# EAGLE board untitled (EAGLE 9.3.1)
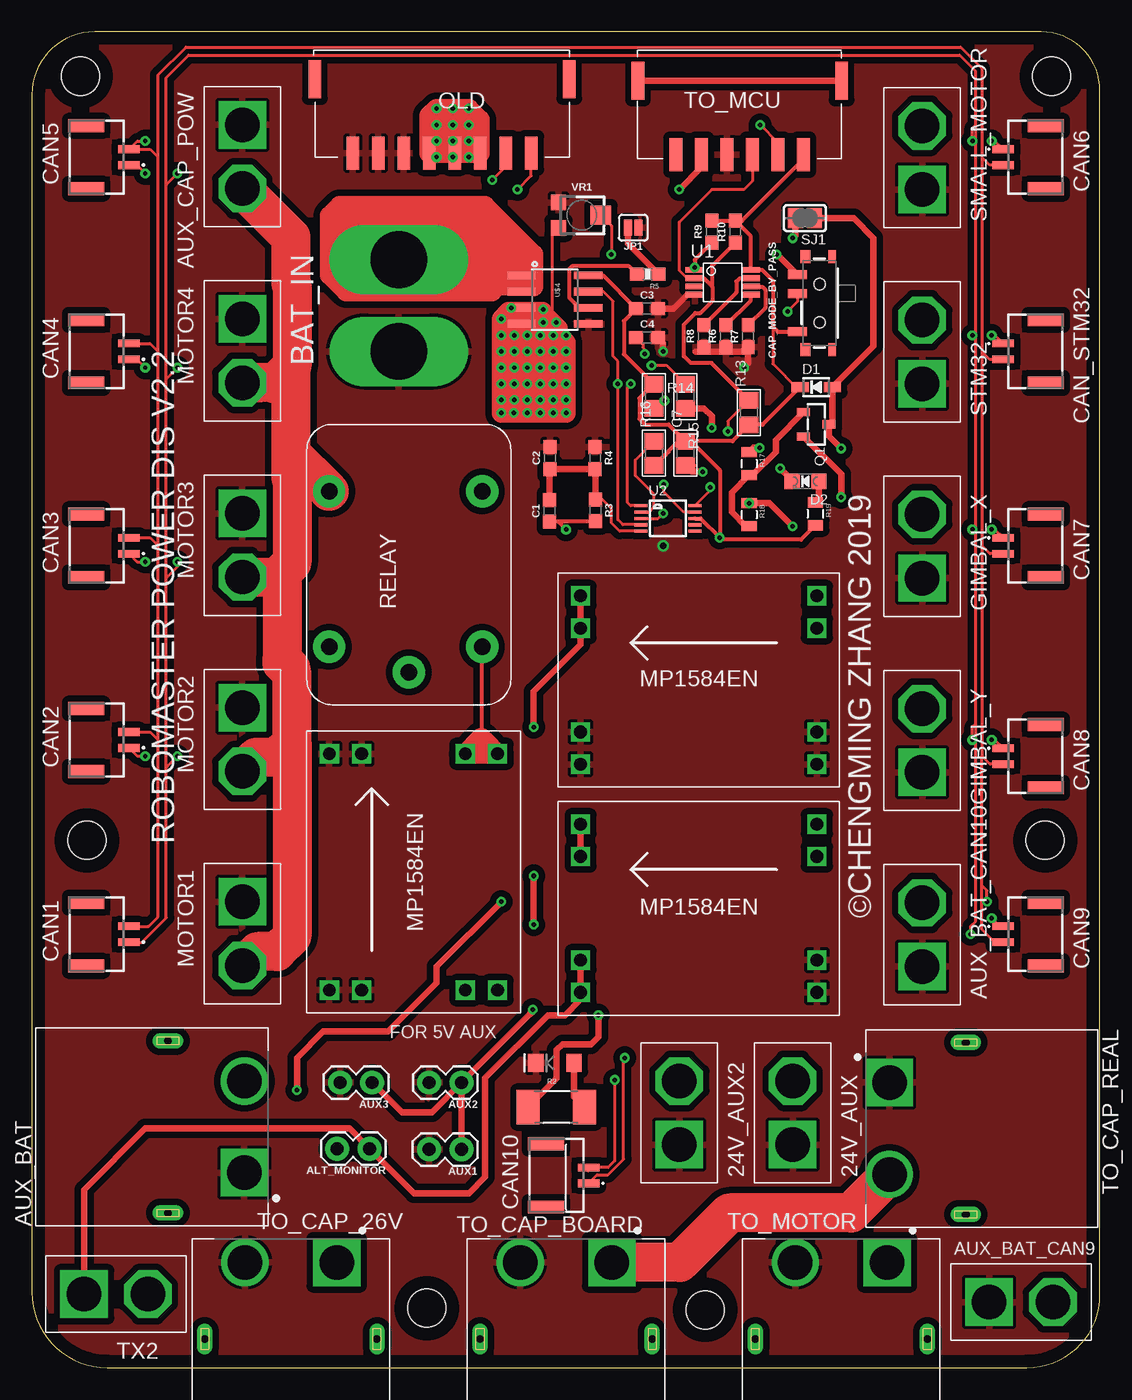
[diagram p0: board, top side]
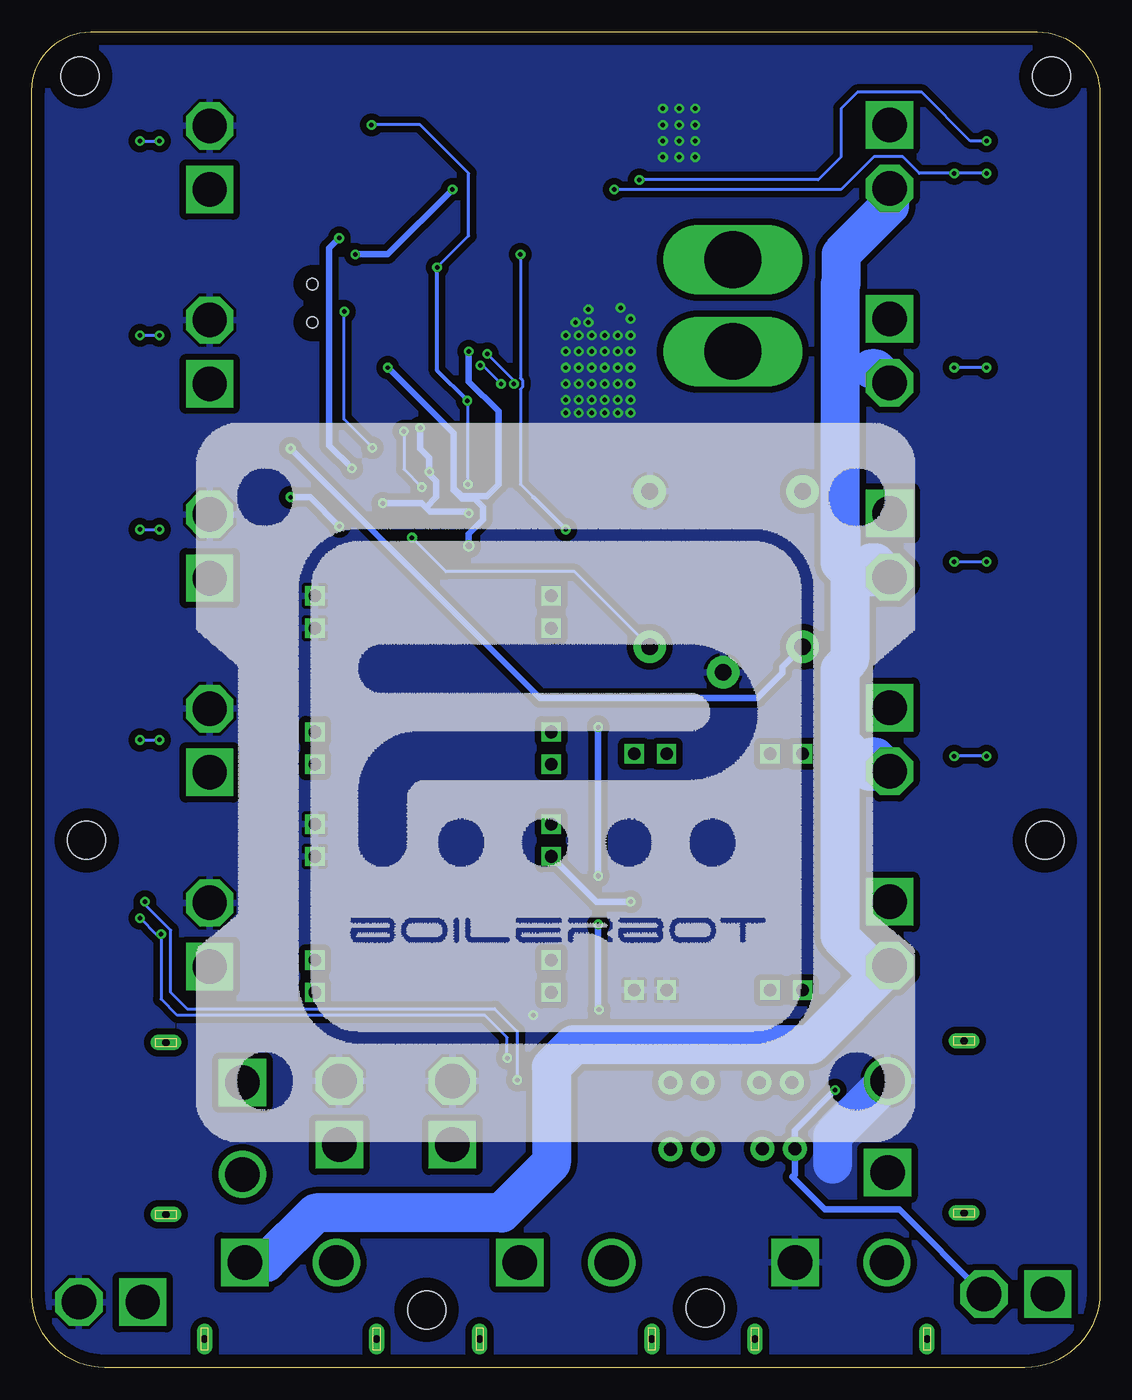
[diagram p1: board, bottom side, seen from below]

Size 83.8 x 104.79 mm. Coordinates in mm from the lower left corner, seen from the top.
Outline: 79.2,104.79 4.92,104.79 arc90 0,99.87 0,5.91 arc90 5.91,0 78.08,0 arc90 83.8,5.72 83.8,100.19 arc90 79.2,104.79
Copper layers (1*16): Top 0.035mm / dielectric 1.5mm / Bottom 0.035mm
Design rules "default *": minimum track width 6mil, minimum drill 0.35mm, track to track 6mil, track to pad 6mil, pad to pad 6mil, via to via 6mil, smd to smd 6mil, copper to edge 40mil, drill to drill 6mil, minimum pad ring 10mil, minimum via ring 8mil, stop-mask expansion 4mil, vias tented up to drill 20mil, thermal gap 10mil
Net classes: 0 default: width 0.508 mm, drill 0.254 mm, clearance 0.508 mm; 1 sig: width 0.254 mm, drill 0.305 mm, clearance 0.127 mm
Holes 3 mm at 3.81,101.31 80.01,101.31 4.32,41.37 79.5,41.37 52.83,4.54 30.99,4.66

## Footprints (pad centres in the part's own frame; a part is rotated, then mirrored left to right if it is on the bottom)
XT30 = drill 2.7 square: P$1 0,0 | drill 2.7 octagon: P$2 5,0
1X02 = drill 1.016 pad 1.88: 1 0,0; 2 2.54,0
AMASS_XT60PW-M = drill 2.7 square: 1 -3.6,-6 | drill 2.7: 2 3.6,-6 | drill 0.6 pad 1.2 long: S1 -6.75,0; S2 6.75,0
XT60 = drill 4.45 long: 1 -7.2,7.2; 2 0,7.2
LED-1206 = smd 1.2 x 1.4: A -1.5,0; C 1.5,0
0603 = smd 1.1 x 1: 1 -0.85,0; 2 0.85,0
0805 = smd 1.3 x 1.5: 1 -0.95,0; 2 0.95,0
BM02B-GHS-TBT_1 = smd 0.6 x 1.7: 1 0.625,0; 2 -0.625,0 | smd 1 x 2.8: 3 -2.475,-3.35; 4 2.475,-3.35
SWITCH_SPST_SMD_A = smd 0.7 x 1.5: 1 -2.25,-1.75; 2 -0.75,-1.75; 3 2.25,-1.75 | smd 1 x 0.6: GND1 -3.65,1; GND3 3.65,1 | smd 1 x 0.8: GND2 -3.65,-1.1; GND4 3.65,-1.1 | hole 0.9: -1.5,0; 1.5,0
SOD-323 = smd 1.35 x 0.8: A 1.27,0; C -1.27,0
CHIPLED_0805_NOOUTLINE = smd 1.2 x 1.2: A 0,-1.05; C 0,1.05
SMT-JUMPER_2_NO_SILK = smd 0.635 x 1.27: 1 -0.406,0; 2 0.406,0
S8B-PH-SM4_TB = smd 1 x 2.6: 1 4,7.3; 2 6,7.3; 3 8,7.3; 4 10,7.3; 5 12,7.3; 6 14,7.3; 7 16,7.3; 8 18,7.3 | smd 1 x 3: 9 1.016,1.5; 10 20.984,1.5
SOT23-R = smd 0.635 x 1.016: 1 -0.95,-1; 2 0.95,-1; 3 0,1
R2010 = smd 1.8 x 2.7: 1 -2.2,0; 2 2.2,0
0603-RES = smd 1.1 x 1: 1 -0.85,0; 2 0.85,0
0805' = smd 0.8 x 1.2: 1 -0.9,0; 2 0.9,0
RELAY_G5LE-1 = drill 1.3 pad 2.54: 1 -8.35,0; 2 -6.35,-5.75; 3 5.85,-5.75; 4 5.85,6.25; 5 -6.35,6.25
SOLDERJUMPER_CLOSEDWIRE = smd 1.168 x 1.6: 1 -0.762,0; 2 0.762,0 | smd 0.635 x 0.203: WIRE 0,0
S6B-PH-SM4_TB = smd 1 x 2.6: 1 5.46,9.68; 2 7.46,9.68; 3 9.46,9.68; 4 11.46,9.68; 5 13.46,9.68; 6 15.46,9.68 | smd 1 x 3: GND 2.476,3.88; GND2 18.444,3.88
MSOP-8 = smd 1.45 x 0.45: 1 -2.2,0.975; 2 -2.2,0.325; 3 -2.2,-0.325; 4 -2.2,-0.975; 5 2.2,-0.975; 6 2.2,-0.325; 7 2.2,0.325; 8 2.2,0.975
MSOP10 = smd 0.25 x 1: 1 -1,-2.113; 2 -0.5,-2.113; 3 0,-2.113; 4 0.5,-2.113; 5 1,-2.113; 6 1,2.113; 7 0.5,2.113; 8 0,2.113; 9 -0.5,2.113; 10 -1,2.113
MP1584_AMAZON = drill 1 square: 1 1.778,14.986; 2 1.778,12.446; 3 1.778,4.318; 4 1.778,1.778; 5 20.32,14.986; 6 20.32,12.446; 7 20.32,4.318; 8 20.32,1.778
SO08 = smd 0.61 x 2.21: 1 -1.905,-2.616; 2 -0.635,-2.616; 3 0.635,-2.616; 4 1.905,-2.616; 5 1.905,2.616; 6 0.635,2.616; 7 -0.635,2.616; 8 -1.905,2.616
TRIMPOT-SMD-TC33X = smd 1.2 x 1.2: 1 -1,-1.825; 3 1,-1.825 | smd 1.5 x 1.6: 2 0,1.5

## Placement (x,y rotation side)
24V_AUX  XT30  [XT30]  59.69,17.49 90 top
24V_AUX2  XT30  [XT30]  50.8,17.49 90 top
ALT_MONITOR  [1X02]  26.49,17.18 180 top
AUX1  [1X02]  33.7,17.11 180 top
AUX2  [1X02]  33.71,22.36 180 top
AUX3  [1X02]  26.71,22.36 180 top
AUX_BAT  XT60PW-M  [AMASS_XT60PW-M]  10.67,18.89 90 top
AUX_BAT_CAN9  XT30  [XT30]  75.11,5.14 0 top
AUX_BAT_CAN10  XT30  [XT30]  69.85,31.46 90 top
AUX_CAP_POW  XT30  [XT30]  16.51,97.5 270 top
BAT_IN  XT60  [XT60]  21.59,79.72 270 top
BAT_STATUS  3V 20mA  [LED-1206]  41.04,23.91 180 top
C1  0.1uF  [0603]  40.61,67.21 90 top
C2  0.1uF  [0603]  40.65,71.36 90 top
C3  0.1uF  [0603]  48.26,83.07 0 top
C4  1nF  [0603]  48.26,80.8 0 top
C7  1µF  [0805]  51.27,71.73 90 top
CAN1  BM02B-GHS-TBT(LF)(SN)  [BM02B-GHS-TBT_1]  7.62,34 270 top
CAN2  BM02B-GHS-TBT(LF)(SN)  [BM02B-GHS-TBT_1]  7.62,49.24 270 top
CAN3  BM02B-GHS-TBT(LF)(SN)  [BM02B-GHS-TBT_1]  7.62,64.48 270 top
CAN4  BM02B-GHS-TBT(LF)(SN)  [BM02B-GHS-TBT_1]  7.62,79.72 270 top
CAN5  BM02B-GHS-TBT(LF)(SN)  [BM02B-GHS-TBT_1]  7.62,94.96 270 top
CAN6  BM02B-GHS-TBT(LF)(SN)  [BM02B-GHS-TBT_1]  76.2,94.96 90 top
CAN7  BM02B-GHS-TBT(LF)(SN)  [BM02B-GHS-TBT_1]  76.2,64.48 90 top
CAN8  BM02B-GHS-TBT(LF)(SN)  [BM02B-GHS-TBT_1]  76.2,47.97 90 top
CAN9  BM02B-GHS-TBT(LF)(SN)  [BM02B-GHS-TBT_1]  76.2,34 90 top
CAN10  BM02B-GHS-TBT(LF)(SN)  [BM02B-GHS-TBT_1]  43.69,15.08 270 top
CAN_STM32  BM02B-GHS-TBT(LF)(SN)  [BM02B-GHS-TBT_1]  76.2,79.72 90 top
CAP_MODE_BY_PASS  [SWITCH_SPST_SMD_A]  61.8,83.51 270 top
D1  1N4148  [SOD-323]  61.54,76.92 0 top
D2  CAP_INDICATOR  [CHIPLED_0805_NOOUTLINE]  60.69,69.53 90 top
GIMBAL_X  XT30  [XT30]  69.85,61.94 90 top
GIMBAL_Y  XT30  [XT30]  69.85,46.7 90 top
JP1  JUMPER-SMT_2_NO_SILK  [SMT-JUMPER_2_NO_SILK]  47.18,89.42 180 top
MOTOR1  XT30  [XT30]  16.51,36.54 270 top
MOTOR2  XT30  [XT30]  16.51,51.78 270 top
MOTOR3  XT30  [XT30]  16.51,67.02 270 top
MOTOR4  XT30  [XT30]  16.51,82.26 270 top
OLD  S8B-PH-SM4_TB  [S8B-PH-SM4_TB]  43.18,102.58 180 top
Q1  MMBT2222  [SOT23-R]  61.54,74 270 top
R2  1.2K  [R2010]  41.14,20.44 180 top
R3  10k  [0603]  44.21,67.26 270 top
R4  2.0k  [0603]  44.19,71.36 270 top
R5  4.7K  [0603-RES]  48.32,85.79 180 top
R6  10k  [0603]  54.46,80.92 90 top
R7  10k  [0603]  56.19,80.92 90 top
R8  10k  [0603]  52.73,80.92 90 top
R9  10k  [0603]  53.35,89.11 90 top
R10  10k  [0603]  55.19,89.11 90 top
R13  10K  [0805]  56.27,74.92 90 top
R14  10K  [0805]  48.81,76.19 270 top
R15  10K  [0805]  51.27,76.19 270 top
R16  10K  [0805]  48.81,71.73 90 top
R17  1K  [0805']  56.27,70.92 270 top
R18  10K  [0805']  56.27,66.92 270 top
R19  1K  [0805']  61.48,66.98 270 top
RELAY  RELAY_G5LE  [RELAY_G5LE-1]  29.57,62.9 90 top
SJ1  [SOLDERJUMPER_CLOSEDWIRE]  60.65,90.18 180 top
SMALL_MOTOR  XT30  [XT30]  69.85,92.42 90 top
STM32  XT30  [XT30]  69.85,77.18 90 top
TO_CAP_26V  XT60PW-M  [AMASS_XT60PW-M]  20.32,2.25 180 top
TO_CAP_BOARD  XT60PW-M  [AMASS_XT60PW-M]  41.91,2.25 180 top
TO_CAP_REAL  XT60PW-M  [AMASS_XT60PW-M]  73.28,18.76 270 top
TO_MCU  S6B-PH-SM4_TB  [S6B-PH-SM4_TB]  66,104.84 180 top
TO_MOTOR  XT60PW-M  [AMASS_XT60PW-M]  63.5,2.25 180 top
TX2  XT30  [XT30]  4.09,5.76 0 top
U1  MCP9808MSOP  [MSOP-8]  54.21,85.14 0 top
U2  ADS1115IDGST  [MSOP10]  49.91,66.62 270 top
U$1  MP1584  [MP1584_AMAZON]  38.32,27.84 90 top
U$2  MP1584  [MP1584_AMAZON]  63.37,44.41 180 top
U$4  ACS723  [SO08]  41.04,83.78 270 top
U$5  MP1584  [MP1584_AMAZON]  63.37,62.32 180 top
VR1  10k  [TRIMPOT-SMD-TC33X]  43.14,90.41 270 top

## Library data of the parts
24V_AUX 24V_AUX2 AUX_BAT_CAN9 AUX_BAT_CAN10 AUX_CAP_POW BAT_IN GIMBAL_X GIMBAL_Y MOTOR1-MOTOR4 SMALL_MOTOR STM32 TO_MCU TX2 U$1 U$2 U$5 = NewKevinMade
ALT_MONITOR AUX1-AUX3 = SparkFun-Connectors
AUX_BAT TO_CAP_26V TO_CAP_BOARD TO_CAP_REAL TO_MOTOR = XT60PW-M; AVAILABILITY: Unavailable; MF: AMASS; MP: XT60PW-M; PACKAGE: Package Analog Devices; PRICE: None
BAT_STATUS = SparkFun-LED
C1-C3 = SparkFun-Capacitors; PROD_ID: CAP-00810
C4 = SparkFun-Capacitors; PROD_ID: CAP-07886
C7 D1 D2 Q1 R13-R16 RELAY SJ1 U2 = microbuilder
CAN1-CAN10 CAN_STM32 = SamacSys_Parts; DESCRIPTION: GH 1.25mm header top entry 2 way JST GH Series, 1.25mm Pitch 2 Way Shrouded Straight PCB Header, Surface Mount, Solder Termination; HEIGHT: mm; MANUFACTURER_NAME: JST (JAPAN SOLDERLESS TERMINALS); MANUFACTURER_PART_NUMBER: BM02B-GHS-TBT(LF)(SN); RS_PART_NUMBER: 7521762P
CAP_MODE_BY_PASS = SparkFun-Switches; PROD_ID: SWCH-10651; SF_SKU: COM-10860
JP1 = SparkFun-Jumpers
OLD = KevinMade
R2 = SparkFun-Passives
R3 R6-R10 = SparkFun-Resistors; PROD_ID: RES-00824
R4 = SparkFun-Resistors; PROD_ID: RES-08296
R5 = SparkFun-Resistors; PROD_ID: RES-07857
R17-R19 = SparkFun-Resistors
U1 = MCP9808; AVAILABILITY: Unavailable; DESCRIPTION: MCP9808 Series SMD 3.6 V Memory Module Digital Temperature Sensor - MSOP-8; MF: Microchip; MP: MCP9808-E/MS; PACKAGE: MSOP-8 Microchip; PRICE: None
U$4 = SparkFun-Sensors; PART_#: ACS723ACS723LLCTR-05AB-T2; PROD_ID: IC-13872
VR1 = SparkFun-Resistors; PROD_ID: RES-12428, RES-08048

## Nets
5V_AUX: AUX1.1 AUX2.1 AUX3.1 U$5.7 U$5.8
ADDR [sig]: R15.1 U2.1
ALERT [sig]: R16.2 U2.2
ALT_GND [sig]: ALT_MONITOR.1 TX2.P$1 U$2.5 U$2.6
ALT_VCC [sig]: ALT_MONITOR.2 TX2.P$2 U$2.7 U$2.8
ANALOG_OUT [sig]: C1.2 C2.1 R3.1 R4.2 U2.5
AUX_DIGI: TO_MCU.6
BAT_24V: 24V_AUX2.P$2 24V_AUX.P$2 AUX_BAT.2 AUX_BAT_CAN9.P$2 AUX_BAT_CAN10.P$2 GIMBAL_X.P$2 GIMBAL_Y.P$2 OLD.3 OLD.4 OLD.5 R2.2 RELAY.1 RELAY.3 SMALL_MOTOR.P$2 STM32.P$2 TO_CAP_26V.1 U$1.3 U$1.4 U$2.3 U$2.4 U$4.3 U$4.4 U$5.3 U$5.4 VR1.3
BAT_GND: 24V_AUX2.P$1 24V_AUX.P$1 AUX1.2 AUX2.2 AUX3.2 AUX_BAT.1 AUX_BAT_CAN9.P$1 AUX_BAT_CAN10.P$1 AUX_CAP_POW.P$1 BAT_IN.2 BAT_STATUS.C C2.2 C3.2 C4.2 GIMBAL_X.P$1 GIMBAL_Y.P$1 JP1.1 MOTOR1.P$1 MOTOR2.P$1 MOTOR3.P$1 MOTOR4.P$1 OLD.6 OLD.7 OLD.8 R4.1 R6.1 R7.1 R8.1 SMALL_MOTOR.P$1 STM32.P$1 TO_CAP_26V.2 TO_CAP_BOARD.2 TO_CAP_REAL.1 TO_MCU.4 TO_MOTOR.2 U1.4 U$1.1 U$1.2 U$1.5 U$1.6 U$2.1 U$2.2 U$4.5 U$5.1 U$5.2 U$5.5 U$5.6 VR1.1
BAT_IN: BAT_IN.1 U$4.1 U$4.2
BW_SEL [sig]: R5.2 U$4.6
CAN_H [sig]: CAN1.2 CAN2.2 CAN3.2 CAN4.2 CAN5.2 CAN6.2 CAN7.2 CAN8.2 CAN9.2 CAN10.2 CAN_STM32.2 OLD.2
CAN_L [sig]: CAN1.1 CAN2.1 CAN3.1 CAN4.1 CAN5.1 CAN6.1 CAN7.1 CAN8.1 CAN9.1 CAN10.1 CAN_STM32.1 OLD.1
CAP_24V: TO_CAP_BOARD.1 TO_CAP_REAL.2
CAP_MOTOR_24V: AUX_CAP_POW.P$2 MOTOR1.P$2 MOTOR2.P$2 MOTOR3.P$2 MOTOR4.P$2 RELAY.4 TO_MOTOR.1
CAP_OR_BAT: CAP_MODE_BY_PASS.1 TO_MCU.5
GND: C7.1 Q1.2 R15.2 R18.1 U2.3
MCU_VCC [sig]: C3.1 C7.2 CAP_MODE_BY_PASS.3 D1.C R9.2 R10.2 R13.1 R14.1 R16.1 R19.2 RELAY.2 TO_MCU.1 U1.8 U2.8 U$1.7 U$1.8 U$4.8
N$1 [sig]: CAP_MODE_BY_PASS.2 R17.1
N$4 [sig]: JP1.2 R5.1
N$5 [sig]: BAT_STATUS.A R2.1
N$7: TO_MCU.GND TO_MCU.GND2
N$8 [sig]: C1.1 R3.2 VR1.2
N$12: D1.A Q1.3 RELAY.5 SJ1.1
N$13 [sig]: R8.2 U1.7
N$14 [sig]: R7.2 U1.6
N$15 [sig]: R6.2 U1.5
N$22: Q1.1 R17.2 R18.2
N$25: D2.C SJ1.2
N$26: D2.A R19.1
SCL [sig]: R10.1 R13.2 TO_MCU.3 U1.2 U2.10
SDA [sig]: R9.1 R14.2 TO_MCU.2 U1.1 U2.9
VIOUT [sig]: C4.1 U2.4 U$4.7

## Tracks (layer width: path | path; a pad name or v marks a point on that pad's centre or on a via)
5V_AUX  (via drill 0.36)
  Top 0.508: 33.7,22.34 AUX2.1 | U$5.8 U$5.7 43.05,56.73 39.37,53.05 v39.37,50.26 | 39.37,28.02 39.31,27.96 | AUX2.1 39.06,27.71 39.31,27.96 | AUX2.1 33.71,17.12 AUX1.1 | AUX3.1 29.04,20.03 31.38,20.03 AUX2.1 | v39.37,38.57 39.37,37.05 v39.37,34.76 | v39.31,28.08 39.31,27.96
  Bottom 0.508: v39.37,50.26 v39.37,38.57 | v39.37,34.76 39.37,28.15 v39.31,28.08
ADDR  (via drill 0.35)
  Top 0.254: 47.28,67.62 U2.1 46.98,67.62 46.74,67.86 46.74,76.93 v46.99,77.18 | v48.62,78.63 49.78,78.63 R15.1
  Bottom 0.254: v48.62,78.63 48.44,78.63 v46.99,77.18
ALERT
  Top 0.254: U2.2 48.44,67.12 48.82,67.5 48.82,68.39 48.79,68.42 48.79,68.52 47.35,69.97 47.35,71.22 R16.2
ALT_GND
  Top 0.508: U$2.6 U$2.5 43.05,28.89 41.81,27.65 40.49,27.65 35.56,22.72 35.56,14.95 34.29,13.68 29.99,13.68 ALT_MONITOR.1 24.91,18.76 8.89,18.76 4.09,13.96 TX2.P$1
ALT_VCC  (via drill 0.35)
  Top 0.508: U$2.8 U$2.7 | v20.79,21.77 20.79,24.31 22.86,26.38 27.94,26.38 31.75,30.19 31.75,31.46 v36.83,36.54
  Bottom 0.508: TX2.P$2 15.74,12.41 21.59,12.41 24.13,14.95 23.95,15.13 ALT_MONITOR.2 23.95,18.61 v20.79,21.77 | v36.83,36.54 39.5,36.54 U$2.7
ANALOG_OUT
  Top 0.254: U2.5 46.1,65.62 45.47,66.26 45.47,67.4 44.76,68.11 R3.1
  Top 0.508: R3.1 44.21,70.49 R4.2 C2.1 40.61,70.47 C1.2
BAT_24V  (via drill 0.35)
  Top 0.254: VR1.3 40.81,88.9 40.81,81.52 41.34,80.99
  Top 0.508: v44.45,27.65 44.45,25.95 43.88,25.37 41.62,25.37 41.18,24.93 41.18,22.68 R2.2 | 38.42,82.84 U$4.3
  Top 1.016: v41.91,78.45 41.91,80.77 41.53,81.15 41.53,81.62 v40.13,83.02
  Top 1.524: v36.83,80.99 37.47,80.36 38.86,81.75 39.51,81.75 | 38.42,82.84 37.41,82.84 v36.83,82.26 v36.83,80.99 | v36.83,75.91 38.1,75.91 38.42,76.23 38.42,77.5 | v36.83,75.91 v36.83,80.99 | 38.42,77.5 38.42,79.47 40.64,79.47 | 38.42,77.5 38.1,77.18 38.1,77.98 | 38.1,77.98 38.1,79.72 | v36.83,75.91 41.32,80.4 | 41.32,79.47 40.64,79.47 | OLD.3 OLD.4 OLD.5 31.18,98.2 v31.75,98.77 v33.02,98.77 v34.29,98.77 35.18,97.88 OLD.3 | OLD.3 35.18,96.61 v34.29,97.5 v33.02,97.5 v31.75,97.5 v31.75,96.23 v33.02,96.23 v34.29,96.23 | U$4.4 39.31,80.99 40.13,80.99 40.89,80.23 v40.89,79.72 | v40.89,79.72 40.64,79.47 | v38.86,79.72 v38.86,80.99 | v39.88,79.72 39.46,79.31 39.43,79.31 38.1,77.98 | v39.88,80.99 41.34,80.99 41.62,80.7 | 41.62,80.7 41.91,80.42 v41.91,74.89 v36.83,74.89 v36.83,75.91 | v36.83,75.91 v40.89,75.91 | v40.89,77.18 v38.86,77.18 40.13,78.45 v40.89,78.45 | 40.06,82.84 38.42,82.84 | 38.42,82.84 39.51,81.75 | 39.51,81.75 40.13,81.75 | v40.89,79.72 40.89,79.97 41.62,80.7
  Bottom 3.048: AUX_BAT.2 20.98,18.18 20.98,15.95
  other vias: 36.83,79.72 36.83,78.45 36.83,77.18 37.85,80.99 37.85,79.72 37.85,78.45 37.85,77.18 37.85,75.91 38.86,78.45 38.86,75.91 31.75,94.96 33.02,94.96 34.29,94.96 37.62,83.12 37.82,74.89 38.86,74.89 39.88,75.91 39.88,74.89 40.89,80.99 39.88,78.45 39.88,77.18 40.89,74.89 41.91,79.72 41.91,77.18 41.91,75.91 41.91,80.99 40.13,82.01 41.15,82.01
  pour Bottom: -1.27,106.39 -1.27,-1.56 86.36,-1.56 86.36,106.39
BAT_GND  (via drill 0.35, 0.51)
  Top 0.508: U1.4 51.44,84.17 50.34,83.07 C3.2 | 52.07,79.72 55.84,79.72 R7.1 56.19,78.77 v55.87,78.45 | C4.2 49.53,80.38 v49.53,79.72
  Bottom 0.508: 49.5,79.72 v49.53,79.72 49.53,77.37 47.18,75.02 47.18,69.28 48.11,68.36 50.07,68.36 50.72,69.01 | v55.87,78.45 50.73,73.31 50.73,69.03 50.72,69.01 | 50.72,69.01 50.72,68.83 50.05,68.17 49.06,68.17 48.39,67.49 48.39,66.55 49.53,65.41 v49.53,64.48
  pour Top: 0,105.12 0,-0.29 83.82,-0.29 83.82,103.85 82.55,105.12
BAT_IN
  Top 0.508: U$4.2 38.42,84.87
  Top 1.524: BAT_IN.1 31.3,84.42 | 31.3,84.42 36.11,84.42 36.57,84.87 38.42,84.87 U$4.1 37.19,86.92 30.48,86.92 30.48,87.34 | BAT_IN.1 29.64,86.07 36.83,86.07 35.56,84.8 30.91,84.8 BAT_IN.1 | BAT_IN.1 28.79,90.73 29.21,91.15 | 30.48,87.34 30.48,88.61 29.21,89.88 35.56,89.88 38.1,87.34 38.1,86.07 39.37,84.8 39.37,87.34 35.56,91.15 29.21,91.15 | 30.48,87.34 29.21,88.61 35.56,88.61 36.83,87.34 30.48,87.34 | BAT_IN.1 27.94,87.77 27.94,91.15 | 27.94,91.15 24.13,91.15 23.37,90.39 23.37,85.69 24.64,84.42 31.3,84.42 | 27.94,91.15 29.21,91.15 | BAT_IN.1 29.21,86.5 29.21,84.8 25.4,84.8 24.13,86.07 24.13,89.88 26.67,89.88 27.94,88.61 27.94,86.07 | 26.67,86.07 25.4,86.07 25.4,88.61 26.67,88.61 26.67,86.07 | 26.67,86.07 27.94,86.07 | 27.94,86.07 BAT_IN.1
BW_SEL
  Top 0.305: 42.94,83.14 U$4.6 42.94,83.14 | R5.2 46.86,86.4 42.38,86.4 42.14,86.16 42.14,83.94 42.94,83.14
CAN_H  (via drill 0.35)
  Top 0.254: CAN1.2 9.16,34.62 9.91,35.38 9.91,49.24 | 74.55,94.96 74.55,101.92 72.88,103.6 12.09,103.6 9.91,101.42 9.91,94.96 | 74.55,94.96 74.55,79.72 | 74.55,79.72 74.55,64.48 | 74.55,64.48 74.55,47.97 | 74.55,37.81 74.55,34.38 75.56,33.38 CAN9.2 | 74.55,37.81 74.55,47.97 | 9.91,49.24 9.91,64.48 | 9.91,64.48 9.91,79.72 | 9.91,79.72 9.91,94.96 | CAN2.2 9.28,49.86 9.91,49.24 | CAN4.2 9.28,80.34 9.91,79.72 | 9.91,94.96 9.28,95.59 CAN5.2 8.27,96.23 v8.89,96.23 | CAN6.2 75.17,94.34 74.55,94.96 | CAN_STM32.2 75.17,79.09 74.55,79.72 | CAN7.2 75.17,63.86 74.55,64.48 | CAN8.2 75.17,47.34 74.55,47.97 | CAN3.2 9.28,65.11 9.91,64.48 | 43.66,15.43 CAN10.2 45.2,15.71 45.72,16.22 v45.72,22.57 | v74.93,36.54 74.93,37.43 74.55,37.81 | v36.13,93.18 37.18,94.23 OLD.2
  Bottom 0.254: v74.93,36.54 74.93,36.34 72.9,34.31 72.9,29.43 71.63,28.16 47.5,28.16 45.72,26.38 v45.72,22.57 | v8.89,96.23 10.16,96.23 13.97,100.04 19.05,100.04 20.32,98.77 20.32,94.96 22.1,93.18 v36.13,93.18
CAN_L  (via drill 0.35)
  Top 0.254: CAN1.1 8.62,33.38 10.54,35.29 10.54,47.08 | 10.54,47.08 10.54,61.94 | 10.54,61.94 10.54,77.56 | 10.54,77.56 10.54,92.8 | 10.54,92.8 10.54,101.2 12.3,102.96 72.79,102.96 74.04,101.71 74.04,97.5 | 74.04,50.51 74.04,35.02 73.66,34.63 v73.66,34 | 74.04,50.51 74.04,66 | 74.04,66 74.04,81.24 | 74.04,81.24 74.04,97.5 | CAN2.1 8.27,47.97 v8.89,47.97 | v11.43,47.97 10.54,47.08 | CAN3.1 8.27,63.21 v8.89,63.21 | v11.43,63.21 11.43,62.83 10.54,61.94 | CAN4.1 8.24,79.09 v8.89,78.45 | v11.43,78.45 10.54,77.56 | CAN5.1 8.24,94.34 v8.89,93.69 | v11.43,93.69 10.54,92.8 | CAN6.1 75.56,96.23 v75.31,96.23 | v73.79,96.23 73.79,97.25 74.04,97.5 | CAN_STM32.1 75.56,80.99 v75.31,80.99 | v73.79,80.99 74.04,81.24 | CAN7.1 75.56,65.75 v75.31,65.75 | v73.79,65.75 74.04,66 | CAN8.1 75.56,49.24 v75.31,49.24 | v73.79,49.24 73.79,50.26 74.04,50.51 | CAN9.1 75.95,34.62 v75.31,35.27 | v38.1,92.42 39.18,93.5 OLD.1 | CAN10.1 44.36,15.13 45.2,15.13 46.43,16.36 46.43,24.22 v46.51,24.3
  Bottom 0.254: v8.89,47.97 v11.43,47.97 | v8.89,63.21 v11.43,63.21 | v8.89,78.45 v11.43,78.45 | v11.43,93.69 v8.89,93.69 14.17,93.69 15.48,94.99 17.75,94.99 20.32,92.42 v38.1,92.42 | v75.31,96.23 v73.79,96.23 | v75.31,80.99 v73.79,80.99 | v75.31,65.75 v73.79,65.75 | v75.31,49.24 v73.79,49.24 73.66,49.24 | v75.31,35.27 74.04,34 v73.66,34 73.66,28.92 72.39,27.65 48.26,27.65 46.51,25.9 v46.51,24.3
CAP_24V
  Top 3.048: TO_CAP_BOARD.1 50.83,8.25 54.72,12.14 64.26,12.14 TO_CAP_REAL.2
CAP_MOTOR_24V
  Top 3.048: AUX_CAP_POW.P$2 20.32,88.69 20.32,85.04 20.4,84.96 20.4,78.53 20.32,78.45 | 19.63,62.39 19.63,55.57 | 19.63,55.57 20.32,54.88 | MOTOR3.P$2 19.27,62.02 19.63,62.39 | 17.86,77.26 MOTOR4.P$2 18.97,77.26 19.05,77.18 20.32,78.45 | RELAY.4 20.32,71.75 | 20.32,78.45 20.32,71.75 | 20.32,71.75 20.32,69.8 20.4,69.72 20.4,63.15 19.63,62.39 | 19.63,55.57 19.63,55.25 20.4,54.48 20.4,49.08 | 20.4,49.08 20.4,33.84 19.21,32.65 17.7,32.65 16.51,31.46 MOTOR1.P$2 | MOTOR2.P$2 17.62,47.89 19.21,47.89 20.4,49.08
  Bottom 3.048: TO_MOTOR.1 65.4,8.25 61.51,12.14 46.94,12.14 43.03,16.05 43.03,23.59 41.29,25.33 22.72,25.33 MOTOR1.P$2 18.1,31.54 20.4,33.84 20.4,49.08 | AUX_CAP_POW.P$2 16.51,91.15 20.32,87.34 20.32,85.04 20.4,84.96 20.4,63.15 20.32,63.07 | 20.32,65.51 20.32,63.07 | 20.32,63.07 19.63,62.39 | 17.94,47.89 17.62,47.89 MOTOR2.P$2 18.1,46.78 20.4,49.08 | 17.94,63.13 17.62,63.13 MOTOR3.P$2 19.27,62.02 19.63,62.39 | MOTOR4.P$2 17.62,78.37 17.94,78.37 | 19.63,62.39 19.63,55.57 20.4,54.8 20.4,49.08
CAP_OR_BAT  (via drill 0.35)
  Top 0.508: TO_MCU.5 52.54,94.16 v50.8,92.42 | v58.42,87.34 58.47,87.34 CAP_MODE_BY_PASS.1
  Bottom 0.508: v50.8,92.42 55.88,87.34 v58.42,87.34
GND  (via drill 0.35)
  Top 0.254: U2.3 49.13,66.62 v49.53,67.02
  Top 0.508: R15.2 52.74,75.24 53.34,74.64 v53.34,73.72 | 51.88,70.78 C7.1 51.77,70.28 v52.62,70.28 | Q1.2 63.5,70.09 v63.5,68.29 | v59.69,66 57.87,67.82 R18.1
  Bottom 0.508: R18.1 53.21,67.82 52.88,67.48 | 52.88,67.48 52.54,67.15 49.66,67.15 v49.53,67.02 | v53.34,73.72 53.34,72.1 52.62,71.38 v52.62,70.28 52.62,70.1 52.07,69.55 52.07,68.29 52.88,67.48 | v63.5,68.29 61.98,68.29 v59.69,66
  other vias: 56.27,67.82
MCU_VCC  (via drill 0.35)
  Top 0.254: 58.12,81.66 58.12,78.75 60.11,76.76
  Top 0.305: TO_MCU.1 60.54,94.78 55.72,89.96 R10.2 | U$4.8 44.8,85.69 C3.1 46.45,82.11 46.45,79.5 R14.1 48.73,77.14 47.65,76.06 47.65,74.42 48.09,73.99 49.96,73.99 C7.2 | R10.2 56.41,88.74 U1.8 57.28,86.12 58.12,85.28 58.12,81.66 58.52,81.26 CAP_MODE_BY_PASS.3 59.89,81.1 | D1.C 60.11,76.76 57.32,73.97 R13.1 54.98,72.68 C7.2 | 35.32,49.38 RELAY.2 | R9.2 R10.2 | R19.2 60.35,64.96 54.13,64.96 v53.98,65.11 | C7.2 51.7,72.68 53.98,70.41 v53.98,65.11 | U2.8 52.47,66.62 v53.98,65.11 | C7.2 50.71,72.68 49.97,71.94 49.97,71.86 49.73,71.62 49.65,71.62 R16.1
  Top 1.524: 35.56,48.16 U$1.7 35.22,49.38 35.32,49.38 35.56,49.14 | 35.56,48.16 U$1.8 35.56,49.14 | 35.56,48.16 35.56,49.14
  Bottom 0.254: RELAY.2 41.22,62.45 51.31,62.45 v53.98,65.11
N$1  (via drill 0.35)
  Top 0.254: CAP_MODE_BY_PASS.2 60.05,83.61 v59.28,82.84
  Top 0.508: R17.1 56.62,72.17 v57.08,72.17
  Bottom 0.254: v57.08,72.17 59.31,74.39 59.31,82.82 v59.28,82.84
N$4
  Top 0.508: JP1.2 46.77,88.18 R5.1
N$5
  Top 0.508: BAT_STATUS.A 42.54,21.24 R2.1
N$7
  Top 0.508: TO_MCU.GND2 TO_MCU.GND
N$8  (via drill 0.35)
  Top 0.254: VR1.2 45.47,89.58 v45.47,87.34
  Top 0.305: R3.2 40.66,66.41 C1.1 41.3,66.36 v41.91,65.75
  Bottom 0.254: 44.45,68.29 45.47,69.31 45.47,76.76 45.32,76.91 45.32,77.45 45.47,77.6 v45.47,87.34
  Bottom 0.305: 44.45,68.29 v41.91,65.75
N$12  (via drill 0.35)
  Top 0.508: v63.5,72.1 62.54,73.06 Q1.3 62.81,74.27 D1.A 66.04,80.15 66.04,88.61 64.47,90.18 SJ1.1
  Bottom 0.508: RELAY.5 24.9,54.97 24.9,54.48 26.86,52.52 43.92,52.52 v63.5,72.1
N$13
  Top 0.305: R8.2 52.73,81.79 55.27,84.34 55.27,85.21 55.51,85.45 56.39,85.45 U1.7
N$14
  Top 0.305: 56.47,81.77 R7.2 57.54,83.12 57.54,84.56 57.3,84.8 56.42,84.8 U1.6
N$15
  Top 0.305: R6.2 56.41,83.72 U1.5
N$22
  Top 0.508: Q1.1 58.36,72.78 58.36,71.83 56.55,70.02 R17.2 54.91,68.66 54.91,67.1 55.99,66.02 R18.2
N$25  (via drill 0.35)
  Top 0.508: SJ1.2 59.89,88.81 v59.69,88.61 | v58.7,70.56 59.64,69.61 D2.C
  Bottom 0.508: v59.69,88.61 60.48,87.82 60.48,72.34 v58.7,70.56
N$26
  Top 0.508: D2.A 61.74,68.15 R19.1
SCL  (via drill 0.35)
  Top 0.254: TO_MCU.3 56.54,93.08 55.88,92.42 53.34,92.42 50.8,89.88 50.8,86.07 51.4,85.47 U1.2 | R13.2 55.4,75 55.36,75 54.61,74.25 v54.61,73.47 | v53.21,69.08 53.21,68.81 U2.10
  Top 0.305: 53.39,84.8 53.39,83.67 52.45,82.73 52.06,82.73 51.16,81.82 51.16,79.34 51.69,78.81 53.33,78.81 R13.2 | U1.2 52.72,85.47 53.39,84.8 | 53.39,84.8 53.39,86.46 R10.1
  Bottom 0.254: v54.61,73.47 54.61,70.47 v53.21,69.08
SDA  (via drill 0.35)
  Top 0.254: TO_MCU.2 58.54,96.11 v57.15,97.5 | U2.9 51.13,67.12 49.58,68.67 v49.58,69.31
  Top 0.305: R9.1 52.01,86.92 v52.01,86.32 U1.1 | R14.2 49.43,75.86 v49.63,75.86
  Bottom 0.254: v52.01,86.32 49.53,88.8 49.53,93.69 53.34,97.5 v57.15,97.5 | v49.63,75.86 49.59,75.82 49.59,69.5 49.58,69.48 v49.58,69.31
  Bottom 0.305: v49.63,75.86 52.01,78.23 v52.01,86.32
VIOUT  (via drill 0.35)
  Top 0.254: U2.4 46.37,66.12 45.97,66.51 v45.97,77.18 45.97,78.96 45.59,79.34 45.59,83.66 44.84,84.42 U$4.7 | C4.1 47.92,80.28 47.92,80.04 48.07,79.89 v48.07,79.53
  Bottom 0.254: v48.07,79.53 45.97,77.43 v45.97,77.18

## Text on the board
tPlace: FOR 5V AUX
tNames: ROBOMASTER POWER DIS V2.2 | ©CHENGMING ZHANG 2019